# Altium PCB ui_layout-v1.0.PcbDoc
Units mm, origin at the board's own origin, x right, y up, seen from the top; angles counter-clockwise.
Board outline 78.99 x 54.1 mm, 4 copper layers (Power Plane, Signal Layer 1, Signal Layer 2, GND Plane), stack 1.605 mm thick; 44 components, 48 nets, 162 pads, 82 vias.
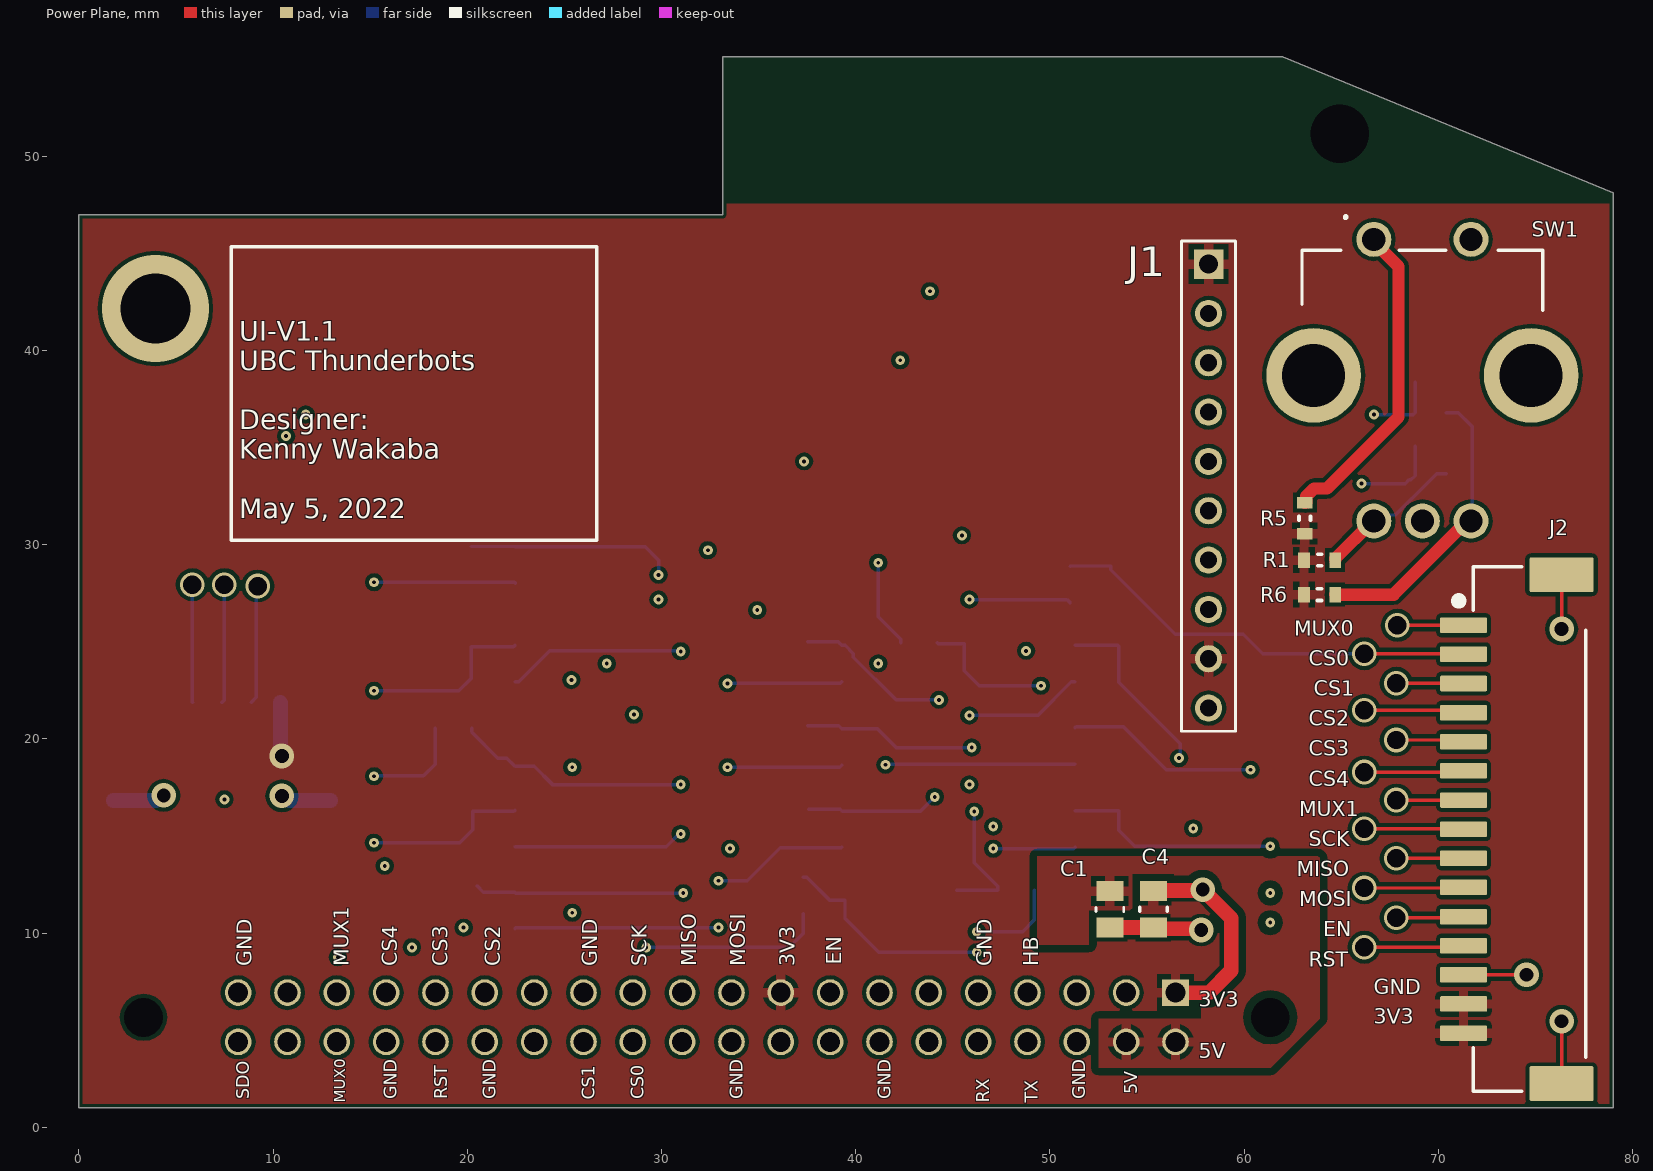
[diagram p0: Power Plane view]
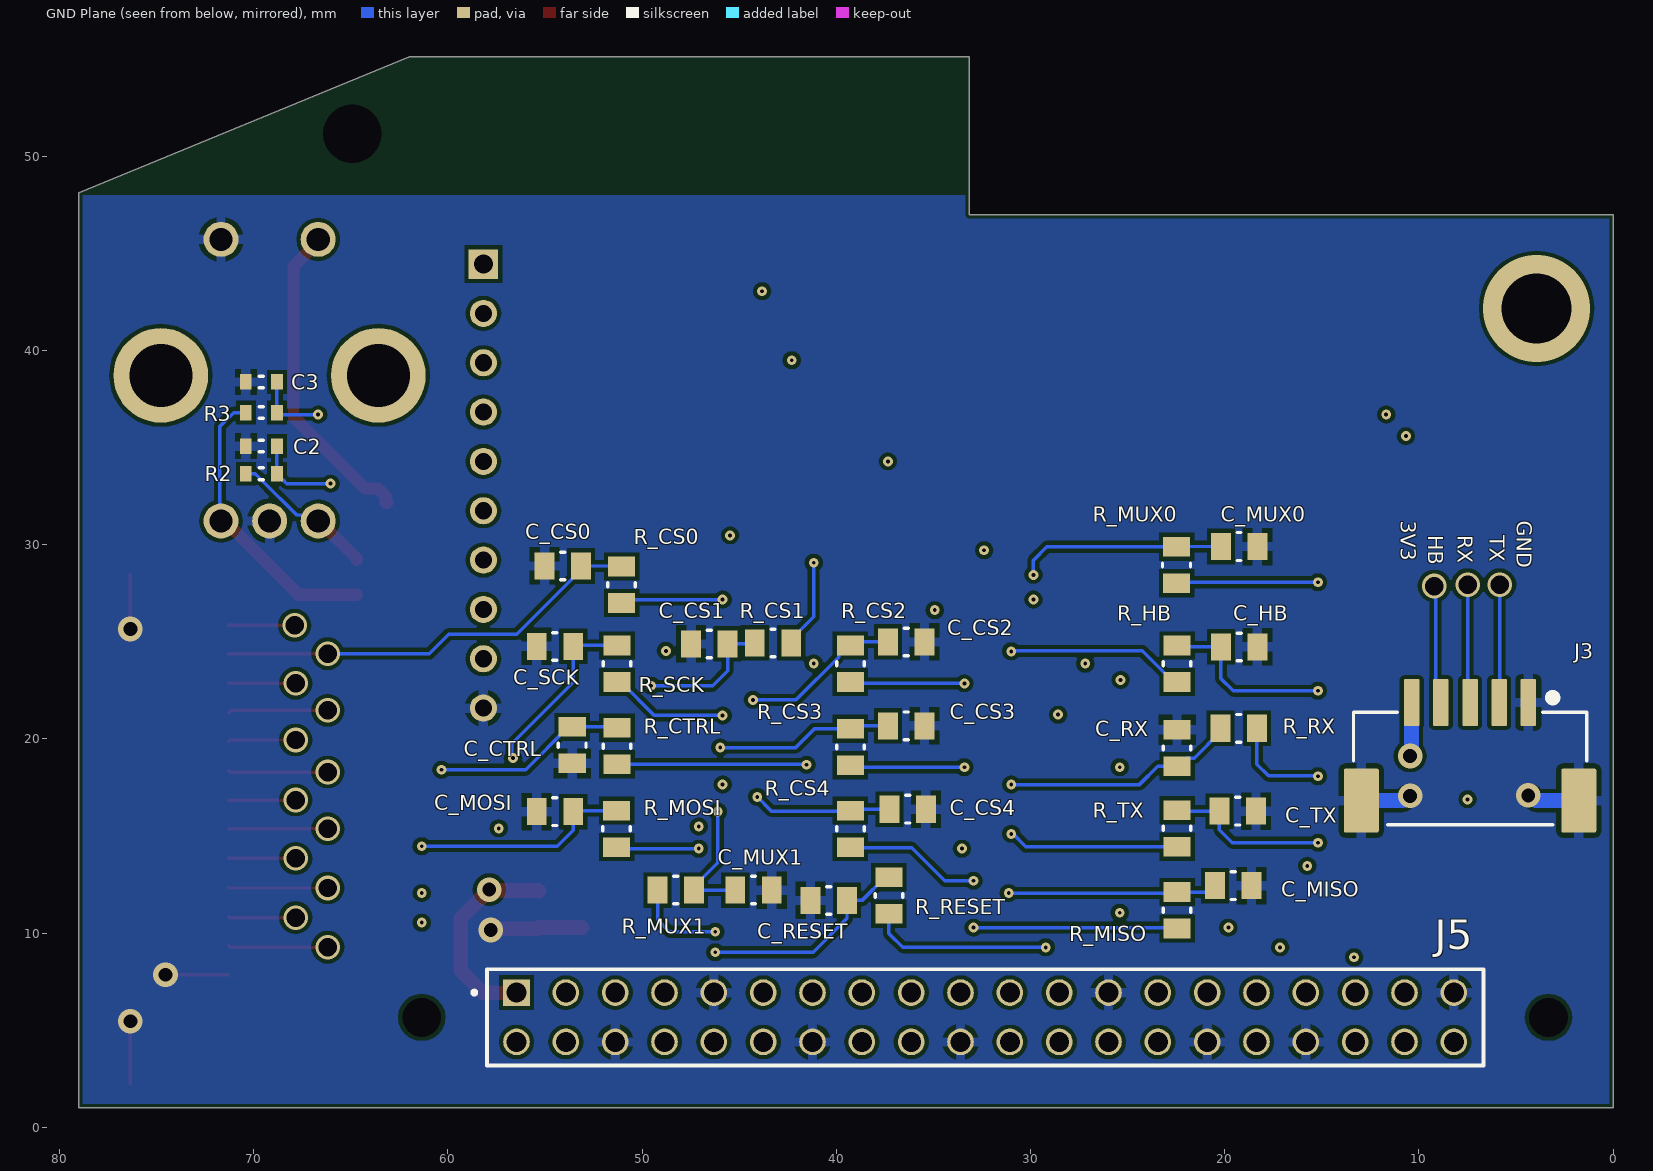
[diagram p1: GND Plane view, seen from below]
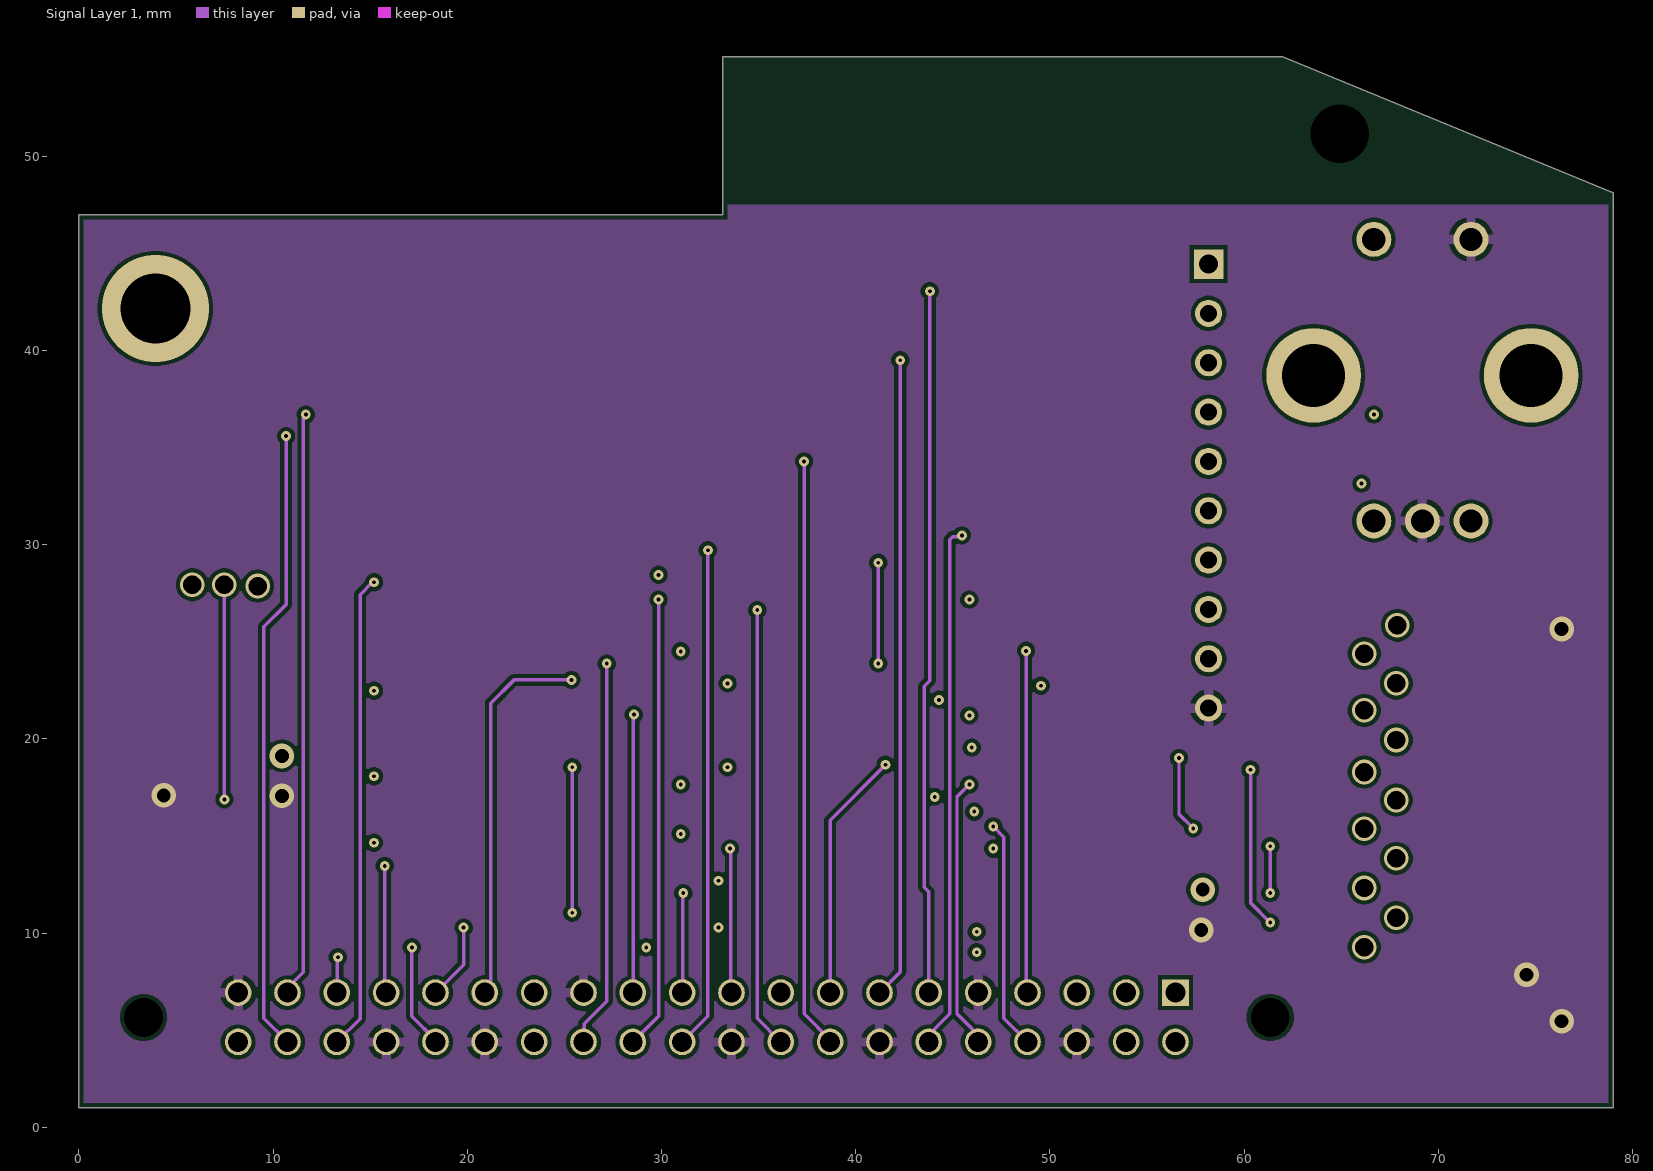
[diagram p2: Signal Layer 1]
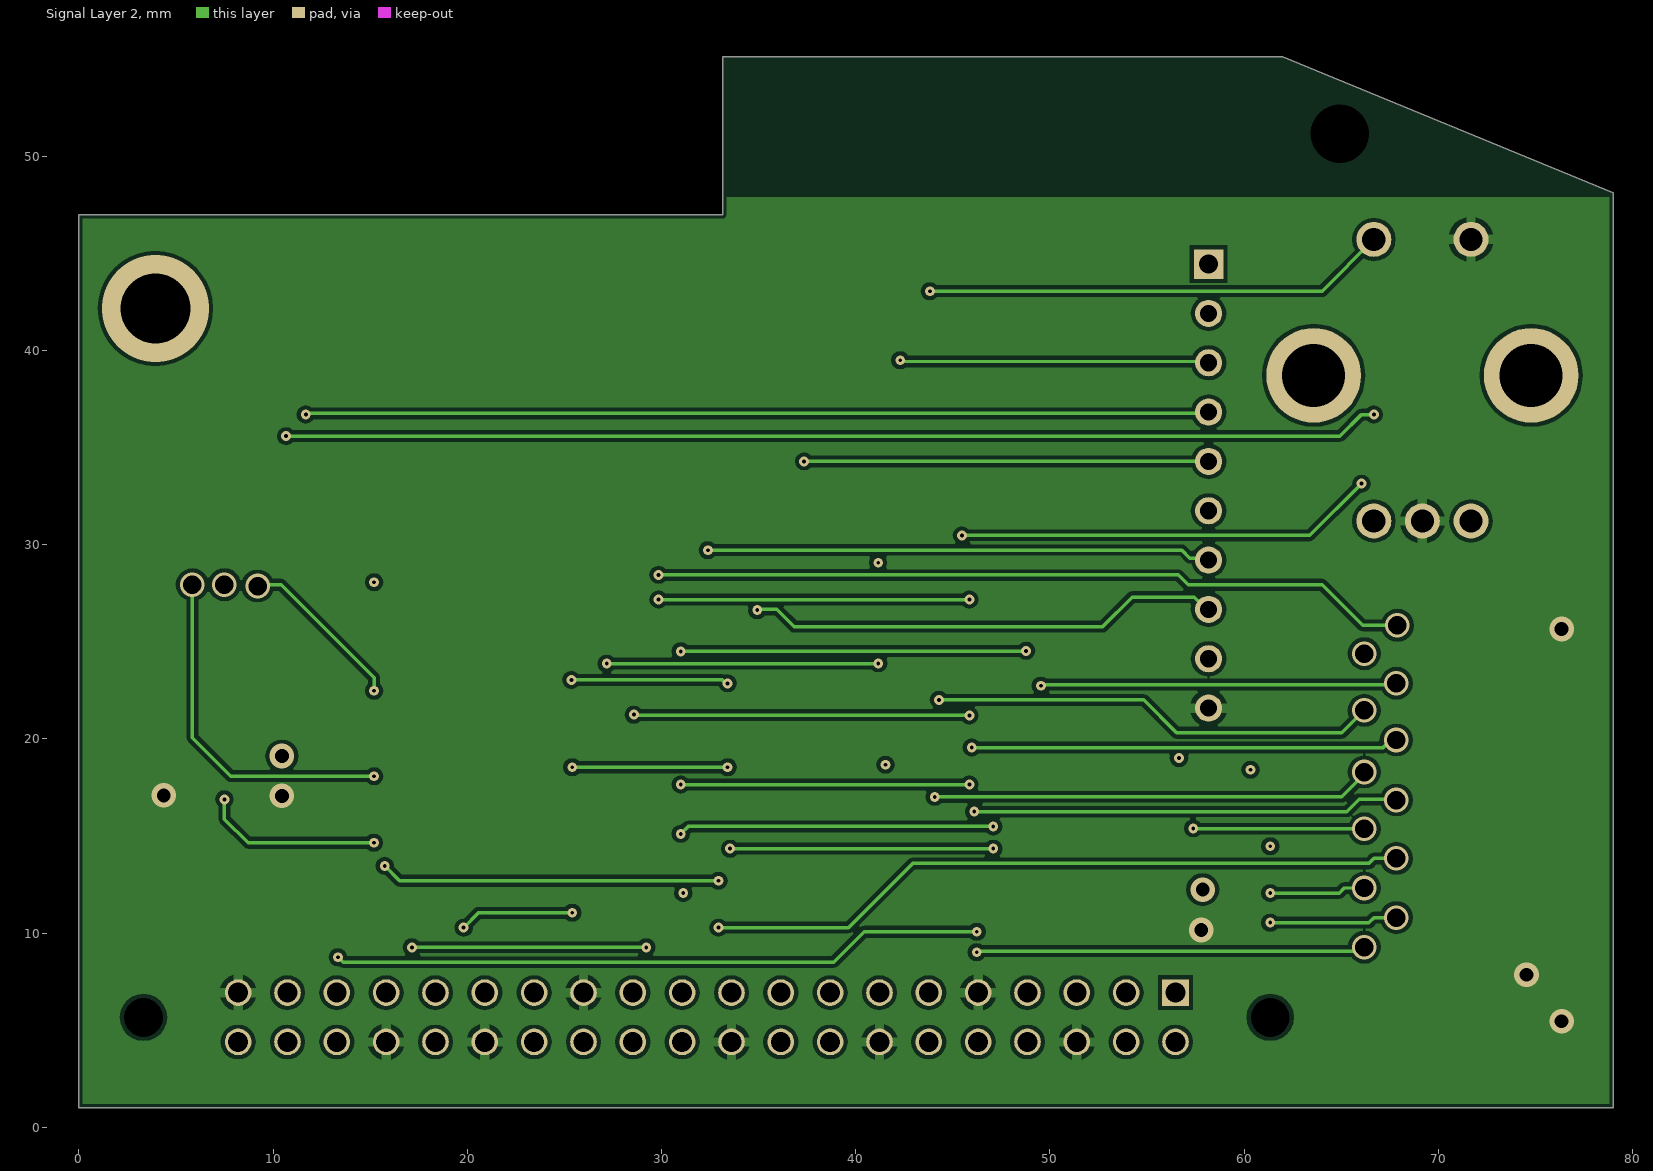
[diagram p3: Signal Layer 2]

## Layer stack, top to bottom
Top Mask: solder mask 0.015, Solder Resist, Dk 3.8
Power Plane: signal copper 0.035
Dielectric 1: prepreg 0.1, 2313, Dk 4.05
Signal Layer 1: signal copper 0.035
Core: core 1.265, FR-4, Dk 4.5
Signal Layer 2: signal copper 0.035
Dielectric 2: prepreg 0.1, 2313, Dk 4.05
GND Plane: signal copper 0.035
Bottom Mask: solder mask 0.015, Solder Resist, Dk 3.8

## Board outline
33.147,55.118 33.147,46.99 0,46.99 0,1.016 78.994,1.016 78.994,48.133 61.976,55.118

## Design rules (kind name [scope] priority, off if disabled: settings)
BoardOutlineClearance [All] p1: gap=0.2 ignorepadtopadclearanceinfootprint=FALSE except(0.4: Arc-SplitBarrior Arc-SplitContinuation Track-SplitBarrior Track-SplitContinuation SMDPad-SplitBarrior SMDPad-SplitContinuation THPad-SplitBarrior THPad-SplitContinuation Via-SplitBarrior Via-SplitContinuation Fill-SplitBarrior Fill-SplitContinuation Poly-SplitBarrior Poly-SplitContinuation Region-SplitBarrior Region-SplitContinuation Text-SplitBarrior Text-SplitContinuation)
Clearance "JETSON_5V Polygon Clearance" [(InNet('JETSON_5V')) AND InPolygon] p1: gap=0.381 ignorepadtopadclearanceinfootprint=FALSE
Clearance "POWER_5V Polygon Clearance" [(InNet('POWER_5V')) AND InPolygon] p2: gap=0.508 ignorepadtopadclearanceinfootprint=TRUE
Clearance [All] p3: gap=0.203 ignorepadtopadclearanceinfootprint=FALSE
HoleSize [All] p1: absolutevalues=TRUE maxlimit=6.3 minlimit=0.2 maxpercent=80.000 minpercent=20.000
MinimumAnnularRing [All] p1: minimumring=0.076
MinimumSolderMaskSliver [All] p1: minsoldermaskwidth=0.1
PolygonConnect PolygonConnect_1 [All] p1: thpad.connectstyle=Relief thpad.reliefconductorwidth=0.508 thpad.reliefentries=4 thpad.polygonreliefangle="90 Angle" thpad.airgapwidth=0.254 smdpad.connectstyle=Relief smdpad.reliefconductorwidth=0.508 smdpad.reliefentries=4 smdpad.polygonreliefangle="90 Angle" smdpad.airgapwidth=0.254 via.connectstyle=Direct via.reliefconductorwidth=0.508 via.reliefentries=4 via.polygonreliefangle="90 Angle" via.airgapwidth=0.254
RoutingCorners [All] p1: cornerstyle=Round minsetback=2.54 maxsetback=2.54
RoutingVias [All] p1: holewidth=0.5 width=1 viastyle="Through Hole" minholewidth=0.2 minwidth=0.45 maxholewidth=1 maxwidth=2
SilkToSilkClearance [All] p1: silktosilkclearance=0.1
SilkToSolderMaskClearance [IsPad] p1: minsilkscreentomaskgap=0.1 clearancetoexposedcopper=TRUE
SolderMaskExpansion [All] p1: expansion=0.102 istentingtop=FALSE
Width [All] p1: maxlimit=2.54 minlimit=0.178 preferedwidth=0.381
25 further rules are at their usual default settings.

## Classes and differential pairs
component class U_low-pass-filter_10: C6_14_13 R4_14_13
component class U_low-pass-filter_6: C6_14_9 R4_14_9
component class U_low-pass-filter_8: C6_14_11 R4_14_11
component class CTRL_EN: C6_14_1 R4_14_1
component class U_low-pass-filter_11: C6_14_14 R4_14_14
component class U_low-pass-filter_7: C6_14_10 R4_14_10
component class FILTER_HEARTBEAT: C6_14_2 R4_14_2
component class U_low-pass-filter_0: C6_14_3 R4_14_3
component class "Jetson Nano Interface": C1 C4 J4 J5
component class U_power: J3
component class U_motordriver: J2
component class "Rotary Encoder": C2 C3 R1 R2 R3 R5 R6 SW1
component class Display: J1
component class U_low-pass-filter_9: C6_14_12 R4_14_12
component class U_low-pass-filter_12: C6_14_15 R4_14_15
component class U_low-pass-filter_5: C6_14_8 R4_14_8
component class U_low-pass-filter_4: C6_14_7 R4_14_7
component class U_low-pass-filter_3: C6_14_6 R4_14_6
component class U_low-pass-filter_2: C6_14_5 R4_14_5
component class U_low-pass-filter_1: C6_14_4 R4_14_4
channel class low-pass-filter: CTRL_EN_FILTER HEARTBEAT_FILTER RESET_FILTER SPI1_CS0_FILTER SPI1_CS1_FILTER SPI1_CS2_FILTER SPI1_CS3_FILTER SPI1_CS4_FILTER SPI1_CS5_FILTER SPI1_MISO_FILTER SPI1_MOSI_FILTER SPI1_SCK_FILTER UART2_RX_FILTER UART2_TX_FILTER

## Components (designator, comment, footprint, x,y, rotation, side; value= is the part's Value field where it differs from the comment)
C1 "0.1uF 25V" 0805 53.086,11.227 r90 top value=0.1uF
C2 "CAP 0.010uF 16V" 0603 69.596,35.077 r180 bottom value=0.010uF
C3 "CAP 0.010uF 16V" 0603 69.596,38.379 r180 bottom value=0.010uF
C4 "0.1uF 25V" 0805 55.321,11.227 r90 top value=0.1uF
C_CS0 "330pF 16V" 0805 54.077,28.905 r180 bottom value=330pF (schematic designator C6_14)
C_CS1 "330pF 16V" 0805 46.533,24.892 r180 bottom value=330pF (schematic designator C6_14)
C_CS2 "330pF 16V" 0805 36.398,24.994 r0 bottom value=330pF (schematic designator C6_14)
C_CS3 "330pF 16V" 0805 36.398,20.676 r0 bottom value=330pF (schematic designator C6_14)
C_CS4 "330pF 16V" 0805 36.322,16.383 r0 bottom value=330pF (schematic designator C6_14)
C_CTRL "330pF 16V" 0805 53.594,19.685 r90 bottom value=330pF (schematic designator C6_14)
C_HB "330pF 16V" 0805 19.253,24.74 r0 bottom value=330pF (schematic designator C6_14)
C_MISO "330pF 16V" 0805 19.558,12.446 r0 bottom value=330pF (schematic designator C6_14)
C_MOSI "330pF 16V" 0805 54.483,16.256 r180 bottom value=330pF (schematic designator C6_14)
C_MUX0 "330pF 16V" 0805 19.253,29.909 r0 bottom value=330pF (schematic designator C6_14)
C_MUX1 "330pF 16V" 0805 44.259,12.217 r0 bottom value=330pF (schematic designator C6_14)
C_RESET "330pF 16V" 0805 40.386,11.684 r180 bottom value=330pF (schematic designator C6_14)
C_RX "330pF 16V" 0805 22.454,19.533 r270 bottom value=330pF (schematic designator C6_14)
C_SCK "330pF 16V" 0805 54.483,24.765 r180 bottom value=330pF (schematic designator C6_14)
C_TX "330pF 16V" 0805 19.329,16.281 r0 bottom value=330pF (schematic designator C6_14)
J1 "1-87220-0" 1-87224-0_TYC 58.166,44.45 r90 top
J2 "BM15B-ZESS-TBT(LF)(SN)" "JST ZE SMT 15POS" 74.041,14.605 r90 top
J3 "BM05B-ZESS-TBT(LF)(SN)" "JST ZE SMT 5POS" 7.366,19.126 r180 bottom
J5 "CN HDR 40POS" "CN HDR 40POS 0.1 TH" 32.33,5.67 r0 bottom
R1 "RES 10k 1/8W - 1%" 0603 63.881,29.21 r180 top value=1
R2 "RES 10k 1/8W - 1%" 0603 69.596,33.655 r180 bottom value=1
R3 "RES 10k 1/8W - 1%" 0603 69.596,36.805 r0 bottom value=1
R5 "RES 2k 1/8W" 0603 63.119,31.369 r90 top value=1
R6 "RES 10k 1/8W - 1%" 0603 63.881,27.432 r180 top value=1
R_CS0 "100" 0805 51.054,27.94 r270 bottom value=1 (schematic designator R4_14)
R_CS1 "100" 0805 43.256,24.943 r180 bottom value=1 (schematic designator R4_14)
R_CS2 "100" 0805 39.268,23.876 r270 bottom value=1 (schematic designator R4_14)
R_CS3 "100" 0805 39.268,19.583 r270 bottom value=1 (schematic designator R4_14)
R_CS4 "100" 0805 39.268,15.367 r270 bottom value=1 (schematic designator R4_14)
R_CTRL "100" 0805 51.287,19.634 r270 bottom value=1 (schematic designator R4_14)
R_HB "100" 0805 22.454,23.876 r270 bottom value=1 (schematic designator R4_14)
R_MISO "100" 0805 22.454,11.176 r270 bottom value=1 (schematic designator R4_14)
R_MOSI "100" 0805 51.308,15.367 r270 bottom value=1 (schematic designator R4_14)
R_MUX0 "100" 0805 22.479,28.956 r270 bottom value=1 (schematic designator R4_14)
R_MUX1 "100" 0805 48.26,12.217 r0 bottom value=1 (schematic designator R4_14)
R_RESET "100" 0805 37.287,11.938 r270 bottom value=1 (schematic designator R4_14)
R_RX "100" 0805 19.279,20.549 r180 bottom value=1 (schematic designator R4_14)
R_SCK "100" 0805 51.287,23.876 r270 bottom value=1 (schematic designator R4_14)
R_TX "100" 0805 22.454,15.392 r270 bottom value=1 (schematic designator R4_14)
SW1 "PEC12R-4220F-S0024" PEC12R4220FS0024 66.675,45.72 r0 top

## Footprints (in the part's own frame and the unit in brackets; to place one, negate y for a bottom-side part, rotate by r counter-clockwise, add the part's x,y. Pads: shape width x height; smd on the part's side, far side on the other; paste and mask are expansions set on the pad)
1-87224-0_TYC [mil]
  rect 60x60 hole 38 mask+0: 1(0,0)
  round 55 hole 35 mask+0: 2(-100,0) 3(-200,0) 4(-300,0) 5(-400,0) 6(-500,0) 7(-600,0) 8(-700,0) 9(-800,0) 10(-900,0)
  silkscreen extent -947,-55 47,55, body extent -950,-50 50,50, height 90
0603 [mm] "Chip Resistor, 2-Leads, Body 1.60x0.80mm, IPC High Density"
  rect 0.6x0.8 smd mask+0.1: 1(-0.8,0) 2(0.8,0)
  silkscreen extent -0.1,-0.3 0.1,0.3, body extent -0.8,-0.4 0.8,0.4, height 0.6
0805 [mil] "40 Position Header Connector 0.100\" (2.54mm) Through Hole"
  rect 40x55 smd: 1(-37,0) 2(37,0)
  silkscreen extent -4,-28 4,28, body extent -47,-28 47,28, height 24
"CN HDR 40POS 0.1 TH" [mm] "40 Position Header Connector 0.100\" (2.54mm) Through Hole"
  rect 1.37x1.37 hole 1.02: 01(24.13,-1.27)
  round 1.37 hole 1.02: 02(24.13,1.27) 03(21.59,-1.27) 04(21.59,1.27) 05(19.05,-1.27) 06(19.05,1.27) 07(16.51,-1.27) 08(16.51,1.27) 09(13.97,-1.27) 10(13.97,1.27) 11(11.43,-1.27) 12(11.43,1.27) 13(8.89,-1.27) 14(8.89,1.27) 15(6.35,-1.27) 16(6.35,1.27) 17(3.81,-1.27) 18(3.81,1.27) 19(1.27,-1.27) 20(1.27,1.27) 21(-1.27,-1.27) 22(-1.27,1.27) 23(-3.81,-1.27) 24(-3.81,1.27) 25(-6.35,-1.27) 26(-6.35,1.27) 27(-8.89,-1.27) 28(-8.89,1.27) 29(-11.43,-1.27) 30(-11.43,1.27) 31(-13.97,-1.27) 32(-13.97,1.27) 33(-16.51,-1.27) 34(-16.51,1.27) 35(-19.05,-1.27) 36(-19.05,1.27) 37(-21.59,-1.27) 38(-21.59,1.27) 39(-24.13,-1.27) 40(-24.13,1.27)
  silkscreen extent -25.66,-2.47 26.4,2.47
"JST ZE SMT 5POS" [mm] "5 POS HDR JST ZE"
  rrect10% 1.8x3.3 smd: 0(-5.6,-2.3) 0(5.6,-2.3)
  rrect10% 0.8x2.4 smd: 1(3,2.75) 2(1.5,2.75) 3(0,2.75) 4(-1.5,2.75) 5(-3,2.75)
  silkscreen extent -6,-3.55 6,3, body extent -6,-2.9 6,4.1, height 7.51
"JST ZE SMT 15POS" [mm] "15 POS HDR JST ZE"
  rrect10% 1.8x3.3 smd: 0(-12.35,-2.3) 0(13.85,-2.3)
  rrect10% 0.8x2.4 smd: 1(11.25,2.75) 2(9.75,2.75) 3(8.25,2.75) 4(6.75,2.75) 5(5.25,2.75) 6(3.75,2.75) 7(2.25,2.75) 8(0.75,2.75) 9(-0.75,2.75) 10(-2.25,2.75) 11(-3.75,2.75) 12(-5.25,2.75) 13(-6.75,2.75) 14(-8.25,2.75) 15(-9.75,2.75)
  silkscreen extent -12.75,-3.55 14.26,3, body extent -12.75,-3.55 14.25,3.45, height 7.6
PEC12R4220FS0024 [mm]
  round 1.8 hole 1.2: 1(0,0) 2(5,0) A1(0,-14.5) B1(5,-14.5) C1(2.5,-14.5)
  round 4.875 hole 3.25: MH1(8.1,-7) MH2(-3.1,-7)
  silkscreen extent -3.7,-3.65 8.7,1.2, body extent -4.61,-15 9.62,0.5, height 20.1

## Part data
C1 C4: library part "CAP 0.1uF 25V", "Default Symbol for Capacitors", Operating Temperature="-55°C ~ 125°C", Rating=25V, Temperature Coefficient=X7R, Tolerance=10%, Part Number="CAP 0.1uF 25V"
C2 C3: "Default Symbol for Capacitors", Operating Temperature="-55°C ~ 125°C", Rating=16V, Temperature Coefficient=X5R, Tolerance=10%, Part Number="CAP 0.010uF 16V"
C_CS0 C_CS1 C_CS2 C_CS3 C_CS4 C_CTRL C_HB C_MISO C_MOSI C_MUX0 C_MUX1 C_RESET C_RX C_SCK C_TX: library part "CAP 330pF 16V", "Default Symbol for Capacitors", Rating=16V, Temperature Coefficient=X5R, Tolerance=10%, Part Number="CAP 330pF 16V"
J1: "No Description Available", Mfr_Name="TE Connectivity", Copyright="Copyright (C) 2021 Ultra Librarian. All rights reserved.", Manufacturer_Part_Number=1-87220-0, RefDes=RefDes, Type=DEV
J2: library part "CN 15POS JST ZE SMT", "CONN HEADER VERT SMD 15POS ZE", Supplier Part Number 1=455-4211-1-ND, Supplier 1=Digi-Key
J3: library part "CN 5POS JST ZE SMT", "CONN HEADER VERT SMD 5POS ZE", Supplier Part Number 1=455-2383-1-ND, Manufacturer Part Number=BM05B-ZESS-TBT(LF)(SN), Part Number="CN 5POS JST ZE SMT", Pin Count=5, Supplier 1=Digi-Key, Supplier URL 1=https://www.digikey.ca/en/products/detail/jst-sales-america-inc/BM05B-ZESS-TBT-LF-SN/1886989?s=N4IgTCBcDaIEIFkAMBWOBaAWgUQMq-QBU5CAKAGQDEBKU3AOWpAF0BfIA
J5: "40 Position Header Connector", Supplier Part Number 1=S6104-ND, Part Number="CN HDR 40POS", Pin Count=40, Supplier 1=Digi-Key, Supplier URL 1=https://www.digikey.ca/en/products/detail/sullins-connector-solutions/PPTC202LFBN-RC/807240?s=N4IgTCBcDaIMoDYCMAGALAWgHIBEQF0BfIA
R1 R2 R3 R5 R6: "Default Resistor Symbol", Package=0805, Power (Watts)=0.125W, Tolerance=5%
  R1 R2 R3 R6: Part Number="RES 10k 1/8W - 1%"
  R5: Part Number="RES 2k 1/8W"
R_CS0 R_CS1 R_CS2 R_CS3 R_CS4 R_CTRL R_HB R_MISO R_MOSI R_MUX0 R_MUX1 R_RESET R_RX R_SCK R_TX: library part "RES 100.0 1/8W", "Default Resistor Symbol", Package=0805, Power (Watts)=0.125W, Tolerance=5%, Part Number="RES 100.0 1/8W"
SW1: library part PEC12R4220FS0024, "Rotary Encoder", Manufacturer_Name=Bourns, Mouser Part Number=652-PEC12R-4220F-S24, Supplier Part Number 1=PEC12R-4220F-S0024-ND, Arrow Part Number=PEC12R-4220F-S0024, Arrow Price/Stock=https://www.arrow.com/en/products/pec12r-4220f-s0024/bourns, Datasheet Link=https://componentsearchengine.com/Datasheets/5/PEC12R-4220F-S0024.pdf, Height=20mm, Manufacturer_Part_Number=PEC12R-4220F-S0024, Mouser Price/Stock=https://www.mouser.co.uk/ProductDetail/Bourns/PEC12R-4220F-S0024?qs=Zq5ylnUbLm7u%2FuPQvUoR4Q%3D%3D, Part Number=PEC12R4220FS0024, Supplier 1=Digi-key, Supplier URL 1=https://www.digikey.ca/en/products/detail/bourns-inc/PEC12R-4220F-S0024/4499653

## Free pads (board coordinates)
  round 1.524 hole 2: 1(3.327,5.664) 1(61.341,5.664)
  round 1.524 hole 3: 1(64.922,51.156)

## Via types
v1: diameter 0.508, hole 0.2, Power Plane to GND Plane, 58 vias
v2: diameter 1.27, hole 0.95, Power Plane to GND Plane, 15 vias
v3: diameter 1.27, hole 0.711, Power Plane to GND Plane, 8 vias
v4: diameter 5.5, hole 3.6, Power Plane to GND Plane, 1 vias

## Nets (pads, with @x,y where several pads share a name; then routed paths per layer and width w, separated by ;. In a path a pad name is that pad's centre, name@x,y a point inside that pad or via, vN(x,y) a via of type N, cw(c..) or ccw(c..) an arc to the next point about the centre after c; other vN are vias at no path point)
DRV_EN: J5.15 R_CTRL.2 | length 22.7
  Signal Layer 1 w0.178: J5.15 38.68,15.82 v1(41.529,18.669)
  GND Plane w0.178: v1(41.529,18.669) 41.557,18.697 51.285,18.697 R_CTRL.2
FILTER_DRV_EN: C_CTRL.2 J2.11 R_CTRL.1 | length 28.3
  Power Plane w0.178: v2(67.832,10.802) 71.238,10.802 J2.11
  Signal Layer 1 w0.178: v1(60.325,18.415) 60.325,11.557 v1(61.341,10.541)
  Signal Layer 2 w0.178: v1(61.341,10.541) 66.421,10.541 66.682,10.802 v2(67.832,10.802)
  GND Plane w0.178: R_CTRL.1 51.338,20.625 C_CTRL.2 53.785,20.625 55.994,18.415 v1(60.325,18.415)
FILTER_HEARTBEAT: C_HB.2 J3.4 R_HB.1 | length 24
  Signal Layer 2 w0.178: v2(9.204,27.873) 9.271,27.94 10.414,27.94 15.198,23.156 v1(15.198,22.479)
  GND Plane w0.178: J3.4 9.137,22.147 9.137,27.806 v2(9.204,27.873) ; v1(15.198,22.479) 19.558,22.479 20.193,23.114 C_HB.2 22.377,24.74 R_HB.1
FILTER_IN_2: J5.07 R_HB.2 | length 44.6
  Signal Layer 1 w0.178: v1(48.768,24.536) 48.768,7.01 J5.07@48.844,6.934
  Signal Layer 2 w0.178: v1(30.988,24.511) 31.001,24.524 48.755,24.524 v1(48.768,24.536)
  GND Plane w0.178: R_HB.2 22.644,22.936 24.244,24.536 v1@30.988,24.536
FILTER_IN_12: J5.32 R_RESET.2 | length 26.8
  Signal Layer 1 w0.178: v1(17.145,9.271) 17.145,5.715 18.36,4.5 J5.32
  Signal Layer 2 w0.178: v1(17.145,9.271) v1(29.21,9.271)
  GND Plane w0.178: v1(29.21,9.271) 36.576,9.271 37.287,9.982 R_RESET.2
FILTER_OUT_12: C_RESET.2 J2.12 R_RESET.1 | length 36.3
  Power Plane w0.178: v2(66.181,9.278) 71.214,9.278 J2.12
  Signal Layer 2 w0.178: v1(46.228,9.017) 46.291,9.08 65.983,9.08 v2(66.181,9.278)
  GND Plane w0.178: R_RESET.1 37.478,12.878 38.672,11.684 C_RESET.2 39.446,10.758 41.187,9.017 v1(46.228,9.017)
FILTER_RE_A: C2.2 J5.12 R2.2 | length 53.2
  Signal Layer 1 w0.178: J5.12@43.764,4.394 43.764,4.727 44.07,5.032 44.07,5.081 44.831,5.842 44.831,30.264 44.984,30.417 45.403,30.417 v1(45.466,30.48)
  Signal Layer 2 w0.178: v1(45.466,30.48) 63.373,30.48 v1(66.04,33.147)
  GND Plane w0.178: v1(66.04,33.147) 68.288,33.147 68.485,33.344 68.585,33.344 68.796,33.555 R2.2 C2.2
FILTER_RE_B: C3.2 J5.38 R3.1 | length 92.4
  Signal Layer 1 w0.178: v1(10.668,35.592) 10.668,26.924 9.525,25.781 9.525,5.615 J5.38
  Signal Layer 2 w0.178: v1(10.668,35.592) 64.929,35.592 66.04,36.703 v1(66.675,36.703)
  GND Plane w0.178: v1(66.675,36.703) 68.694,36.703 R3.1 C3.2
FILTER_RE_PB: J5.11 R5.2 SW1.1 | length 76.9
  Power Plane w0.635: R5.2 63.184,32.169 63.202,32.186 63.202,32.504 63.591,32.893 64.262,32.893 67.945,36.576 67.945,44.323 66.675,45.593 SW1.1
  Signal Layer 1 w0.178: J5.11 43.76,12.135 43.523,12.372 43.523,22.712 43.815,23.004 v1(43.815,43.053)
  Signal Layer 2 w0.178: v1(43.815,43.053) 64.008,43.053 SW1.1
  GND Plane w0.178: SW1.1@66.611,45.656 SW1.1
I2C_1_SCL: J5.28
I2C_1_SDA: J5.27
I2C_2_SCL: J5.05
I2C_2_SDA: J5.03
I2S_4_SDOUT: J5.40
JETSON_3V3: C4.2 J1.1 J1.9 J2.14 J2.15 J3.5 J5.01 J5.17 R1.2 R5.1 R6.2 | length 13.5
  Power Plane w0.762: C4.2 55.359,12.205 57.823,12.205 v3(57.861,12.243) 59.334,10.77 59.334,8.077 58.191,6.934 J5.01@56.464,6.934
  GND Plane w0.762: J3.5 10.385,21.857 10.385,19.193 v3(10.452,19.126)
JETSON_5V: C1.2 J5.02 J5.04
JETSON_GND: C1.1 C2.1 C3.1 C4.1 C_CS0.1 C_CS1.1 C_CS2.1 C_CS3.1 C_CS4.1 C_CTRL.1 C_HB.1 C_MISO.1 C_MOSI.1 C_MUX0.1 C_MUX1.1 C_RESET.1 C_RX.1 C_SCK.1 C_TX.1 J1.10 J2.0 J2.13 J3.0 J3.1 J5.06 J5.09 J5.14 J5.20 J5.25 J5.30 J5.34 J5.39 SW1.2 SW1.C1 | length 19.3
  Power Plane w0.178: J2.13 v3(74.537,7.855) ; J2.0@76.341,2.255 v3(76.341,5.468) ; v3(76.341,25.661) J2.0@76.341,28.455
  Power Plane w0.762: C1.1 C4.1 55.385,10.223 57.721,10.223 v3(57.785,10.16)
  GND Plane w0.762: J3.0@1.766,16.826 3.963,16.826 4.231,17.094 v3(4.369,17.094) ; v3(10.452,17.069) 10.59,17.069 10.832,16.826 J3.0@12.966,16.826
MUX_SEL_0: J5.36 R_MUX0.2 | length 31.8
  Signal Layer 1 w0.178: J5.36 14.478,5.598 14.478,27.432 15.113,28.067 v1(15.198,28.067)
  GND Plane w0.178: v1(15.198,28.067) 22.428,28.067 R_MUX0.2
MUX_SEL_0_FILTER: C_MUX0.2 J2.1 R_MUX0.1 | length 53.2
  Power Plane w0.178: v2(67.887,25.85) 71.286,25.85 J2.1
  Signal Layer 2 w0.178: v1(29.845,28.448) 56.602,28.448 57.11,27.94 64.008,27.94 66.103,25.845 v2@67.882,25.845
  GND Plane w0.178: C_MUX0.2 22.466,29.909 R_MUX0.1 29.159,29.896 29.845,29.21 v1(29.845,28.448)
MUX_SEL_1: J5.35 R_MUX1.2 | length 40.3
  Signal Layer 1 w0.178: J5.35 13.307,6.967 13.307,8.735 v1(13.335,8.763)
  Signal Layer 2 w0.178: v1(13.335,8.763) 13.35,8.763 13.604,8.509 38.862,8.509 40.428,10.075 v1(46.228,10.075)
  GND Plane w0.178: v1(46.228,10.075) 48.596,10.075 49.2,10.679 R_MUX1.2
MUX_SEL_1_FILTER: C_MUX1.2 J2.7 R_MUX1.1 | length 32.1
  Power Plane w0.178: v2(67.832,16.855) J2.7
  Signal Layer 2 w0.178: v1(46.101,16.256) 65.278,16.256 65.913,16.891 67.796,16.891 v2(67.832,16.855)
  GND Plane w0.178: C_MUX1.2 R_MUX1.1 47.32,12.408 46.101,13.627 v1(46.101,16.256)
NetR1_1: R1.1 R2.1 SW1.A1 | length 7.6
  Power Plane w0.635: R1.1 64.681,29.275 66.626,31.22 SW1.A1
  GND Plane w0.178: SW1.A1 66.985,31.53 67.784,31.53 69.523,33.269 69.909,33.655 R2.1
NetR3_2: R3.2 R6.1 SW1.B1 | length 15.1
  Power Plane w0.635: R6.1 67.691,27.432 71.479,31.22 SW1.B1
  GND Plane w0.178: R3.2 71.029,36.805 71.73,36.104 71.73,31.275 SW1.B1
SCREEN_D/C: J1.7 J5.22 | length 51.9
  Signal Layer 1 w0.178: J5.22@31.064,4.404 32.385,5.725 v1(32.385,29.718)
  Signal Layer 2 w0.178: v1(32.385,29.718) 56.796,29.718 57.201,29.313 58.063,29.313 J1.7
SCREEN_MOSI: J1.4 J5.37 | length 76.7
  Signal Layer 1 w0.178: J5.37@10.744,6.934 10.744,7.181 11.557,7.994 11.557,36.487 11.684,36.614 v1(11.684,36.703)
  Signal Layer 2 w0.178: v1(11.684,36.703) 11.747,36.766 58.102,36.766 J1.4
SCREEN_RESET: J1.8 J5.18 | length 47.3
  Signal Layer 1 w0.178: v1(34.925,26.632) 34.925,5.613 J5.18@36.144,4.394
  Signal Layer 2 w0.178: v1(34.925,26.632) 34.963,26.67 35.941,26.67 36.83,25.781 52.705,25.781 54.229,27.305 57.436,27.305 58.071,26.67 J1.8
SCREEN_SCK: J1.3 J5.13 | length 49
  Signal Layer 1 w0.178: J5.13@41.224,6.934 42.291,8.001 v1(42.291,39.497)
  Signal Layer 2 w0.178: v1(42.291,39.497) 42.354,39.434 58.102,39.434 J1.3
  GND Plane w0.178: J1.3@58.115,39.395 J1.3@58.141,39.421
SPI_1_CS0: J5.24 R_CS0.2 | length 44.6
  Signal Layer 1 w0.178: J5.24 28.53,4.4 29.845,5.715 v1(29.845,27.178)
  Signal Layer 2 w0.178: v1(29.845,27.178) v1(45.847,27.178)
  GND Plane w0.178: v1(45.847,27.178) 50.876,27.178 R_CS0.2
SPI_1_CS0_FILTER: C_CS0.2 J2.2 R_CS0.1 | length 22.2
  Power Plane w0.178: v2(66.181,24.391) 71.255,24.391 J2.2
  GND Plane w0.178: R_CS0.1 51.079,28.905 C_CS0.2 53.137,28.715 56.451,25.4 59.944,25.4 60.953,24.391 v2(66.181,24.391)
SPI_1_CS1: J5.26 R_CS1.2 | length 43.8
  Signal Layer 1 w0.178: J5.26@25.984,4.394 26.021,4.431 26.021,5.346 27.178,6.502 v1(27.178,23.876) ; v1@41.148,29.083 41.148,23.899 v1(41.159,23.887)
  Signal Layer 2 w0.178: v1(27.178,23.876) 41.148,23.876 v1(41.159,23.887)
  GND Plane w0.178: v1(41.159,29.072) 41.159,26.29 42.316,25.133 R_CS1.2
SPI_1_CS1_FILTER: C_CS1.2 J2.3 R_CS1.1 | length 28.9
  Power Plane w0.178: v2(67.832,22.867) 71.279,22.867 J2.3
  Signal Layer 2 w0.178: v1(49.53,22.737) 49.593,22.8 67.765,22.8 v2(67.832,22.867)
  GND Plane w0.178: R_CS1.1 44.247,24.892 C_CS1.2 45.593,23.512 46.368,22.737 v1(49.53,22.737)
SPI_1_CS2: J5.29 R_CS2.2 | length 33.7
  Signal Layer 1 w0.178: J5.29 20.9,7.276 21.209,7.585 21.209,21.844 22.402,23.037 v1(25.358,23.037)
  Signal Layer 2 w0.178: v1(25.358,23.037) 33.134,23.037 33.312,22.86 v1(33.401,22.86)
  GND Plane w0.178: v1(33.401,22.86) 39.192,22.86 R_CS2.2
SPI_1_CS2_FILTER: C_CS2.2 J2.4 R_CS2.1 | length 36.3
  Power Plane w0.178: v2(66.181,21.47) 71.176,21.47 J2.4
  Signal Layer 2 w0.178: v1(44.285,22.013) 54.822,22.013 56.515,20.32 65.031,20.32 v2(66.181,21.47)
  GND Plane w0.178: C_CS2.2@37.528,24.994 39.091,24.994 R_CS2.1 39.459,24.816 39.878,24.397 39.878,24.206 42.071,22.013 v1(44.285,22.013)
SPI_1_CS3: J5.31 R_CS3.2 | length 31.3
  Signal Layer 1 w0.178: J5.31 18.37,6.94 19.812,8.382 v1(19.812,10.287) ; v1(25.4,11.049) v1(25.4,18.542)
  Signal Layer 2 w0.178: v1(19.812,10.287) 20.574,11.049 v1(25.4,11.049) ; v1(25.4,18.542) v1(33.401,18.542)
  GND Plane w0.178: v1(33.401,18.542) 39.167,18.542 R_CS3.2
SPI_1_CS3_FILTER: C_CS3.2 J2.5 R_CS3.1 | length 34.4
  Power Plane w0.178: v2(67.832,19.946) 71.2,19.946 J2.5
  Signal Layer 2 w0.178: v1(45.974,19.558) 67.148,19.558 67.536,19.946 v2(67.832,19.946)
  GND Plane w0.178: C_CS3.2@37.528,20.676 39.116,20.676 R_CS3.1 41.121,20.523 42.086,19.558 v1(45.974,19.558)
SPI_1_CS4: J5.33 R_CS4.2 | length 31.1
  Signal Layer 1 w0.178: v1(15.748,13.462) 15.748,7.012 J5.33
  Signal Layer 2 w0.178: v1(15.748,13.462) 16.51,12.7 v1(32.931,12.7)
  GND Plane w0.178: v1(32.931,12.7) 34.417,12.7 36.119,14.402 39.243,14.402 R_CS4.2
SPI_1_CS4_FILTER: C_CS4.2 J2.6 R_CS4.1 | length 34.7
  Power Plane w0.178: v2(66.181,18.295) 71.231,18.295 J2.6
  Signal Layer 2 w0.178: v1(44.069,17.018) 65.024,17.018 66.181,18.175 v2(66.181,18.295)
  GND Plane w0.178: C_CS4.2@37.567,16.383 39.192,16.383 R_CS4.1 39.292,16.284 43.335,16.284 v1(44.069,17.018)
SPI_1_MISO: J2.9 R_MISO.2 | length 50.4
  Power Plane w0.178: v2(67.832,13.85) 71.241,13.85 71.268,13.878 J2.9
  Signal Layer 2 w0.178: v1(32.931,10.287) 39.624,10.287 42.926,13.589 66.421,13.589 66.682,13.85 v2(67.832,13.85)
  GND Plane w0.178: R_MISO.2 22.504,10.287 v1(32.931,10.287)
SPI_1_MISO_FILTER: C_MISO.2 J5.21 R_MISO.1 | length 15.9
  Signal Layer 1 w0.178: J5.21@31.064,6.934 31.087,6.957 31.087,12.037 v1(31.115,12.065)
  GND Plane w0.178: C_MISO.2 20.828,12.116 R_MISO.1 22.504,12.065 v1(31.115,12.065)
SPI_1_MOSI: J5.19 R_MOSI.2 | length 25.3
  Signal Layer 1 w0.178: v1(33.528,14.351) 33.566,14.313 33.566,6.972 J5.19@33.604,6.934
  Signal Layer 2 w0.178: v1(33.528,14.351) v1(47.079,14.351)
  GND Plane w0.178: v1(47.079,14.351) 51.232,14.351 R_MOSI.2
SPI_1_MOSI_FILTER: C_MOSI.2 J2.10 R_MOSI.1 | length 23.8
  Power Plane w0.178: v2(66.181,12.326) 71.262,12.326 J2.10
  Signal Layer 1 w0.178: v1(61.341,12.065) v1(61.341,14.478)
  Signal Layer 2 w0.178: v1(61.341,12.065) 64.897,12.065 65.158,12.326 v2(66.181,12.326)
  GND Plane w0.178: R_MOSI.1 C_MOSI.2@53.543,16.307 ; C_MOSI.2 53.543,15.291 54.356,14.478 v1(61.341,14.478)
SPI_1_SCK: J5.23 R_SCK.2 | length 37.8
  Signal Layer 1 w0.178: J5.23 28.547,6.967 28.547,21.223 v1(28.575,21.251)
  Signal Layer 2 w0.178: v1(28.575,21.251) 28.596,21.23 45.826,21.23 v1(45.847,21.209)
  GND Plane w0.178: v1(45.847,21.209) 49.369,21.209 51.097,22.936 R_SCK.2
SPI_1_SCK_FILTER: C_SCK.2 J2.8 R_SCK.1 | length 27.2
  Power Plane w0.178: v2(66.181,15.374) 71.272,15.374 J2.8
  Signal Layer 1 w0.178: v1(56.642,19.012) 56.642,16.129 v1(57.376,15.395)
  Signal Layer 2 w0.178: v1(57.376,15.395) 57.387,15.384 66.171,15.384 v2(66.181,15.374)
  GND Plane w0.178: R_SCK.1 53.492,24.816 C_SCK.2 53.543,22.911 56.705,19.749 56.705,19.571 56.705,19.075 v1(56.642,19.012)
TFT_CS: J1.5 J5.16 | length 51.3
  Signal Layer 1 w0.178: v1(37.338,34.29) 37.338,5.842 38.68,4.5 J5.16
  Signal Layer 2 w0.178: v1(37.338,34.29) J1.5
UART_2_RX: J3.2 R_RX.2 | length 29.4
  Signal Layer 2 w0.178: v2(5.842,27.94) 5.842,20.066 7.827,18.081 v1(15.198,18.081)
  GND Plane w0.178: v2(5.842,27.94) 5.842,21.9 J3.2 ; v1(15.198,18.081) 15.214,18.097 17.742,18.097 18.339,18.694 R_RX.2
UART_2_RX_FILTER: C_RX.2 J5.10 R_RX.1 | length 40.9
  Signal Layer 1 w0.178: v1(45.847,17.653) 45.212,17.018 45.212,5.842 45.99,5.064 45.99,5.045 46.3,4.735 J5.10
  Signal Layer 2 w0.178: v1(30.988,17.653) v1(45.847,17.653)
  GND Plane w0.178: R_RX.1 20.218,20.358 21.565,19.012 22.034,19.012 C_RX.2 23.444,18.593 24.384,17.653 v1(30.988,17.653)
UART_2_TX: J5.08 R_TX.2 | length 36.9
  Signal Layer 1 w0.178: v1@47.076,15.497 47.625,14.948 47.625,5.615 J5.08
  Signal Layer 2 w0.178: v1(30.988,15.113) 31.369,15.494 v1(47.079,15.494) v1@47.084,15.494
  GND Plane w0.178: R_TX.2 30.238,14.453 30.899,15.113 v1(30.988,15.113)
UART_2_TX_FILTER: C_TX.2 J3.3 R_TX.1 | length 34.9
  Signal Layer 1 w0.178: v2(7.49,27.943) v2(7.49,27.943) 7.491,16.893 v1(7.493,16.891)
  Signal Layer 2 w0.178: v1(7.493,16.891) 7.493,15.875 8.712,14.656 v1(15.189,14.656)
  GND Plane w0.178: J3.3 7.49,22 v2(7.49,27.943) ; v1(15.189,14.656) 19.609,14.656 20.269,15.316 C_TX.2 22.403,16.281 R_TX.1
pads on no net: J1.2 J1.6 SW1.MH1 SW1.MH2
copper on no net:
  other v4: 3.937,42.164

## Polygon pours and split planes (outlines as drawn)
JETSON_3V3 on Power Plane "JETSON_3V3_L01_P007" (solid, pour order 7): 0,0 0,47.549 78.994,47.549 78.994,0
JETSON_5V on Power Plane "JETSON_5V_L01_P004" (solid, pour order 4): 63.881,13.97 63.881,5.588 61.355,3.062 52.501,3.062 52.501,5.588 57.785,5.588 57.785,9.398 49.352,9.398 49.352,13.97
JETSON_GND on GND Plane "JETSON_GND_L04_P001" (solid, pour order 1): 0,0 0,48 79,48 79,0
JETSON_GND on Signal Layer 2 "JETSON_GND_L03_P010" (solid, pour order 10): 0.127,47.879 0.127,0.127 78.867,0.127 78.867,47.879
JETSON_GND on Signal Layer 1 "JETSON_GND_L02_P011" (solid, pour order 11): 0.254,46.736 0.254,1.27 78.74,1.27 78.74,47.498 33.401,47.498 33.401,46.736

## Silkscreen, mask and mechanical layers (free items; w line width, h text height)
Top Overlay:
  lines w0.178: 7.856,30.225 7.856,45.339 26.67,45.339 26.67,30.225 7.856,30.225
  text "UI-V1.1 / UBC Thunderbots /  / Designer: / Kenny Wakaba /  / May 5, 2022" at 8.255,31.369 h1.02
  text "MUX0" at 62.568,25.324 h0.76
  text "CS0" at 63.33,23.774 h0.76
  text "CS1" at 63.584,22.225 h0.76
  text "CS2" at 63.33,20.676 h0.76
  text "CS3" at 63.33,19.126 h0.76
  text "CS4" at 63.33,17.577 h0.76
  text "MUX1" at 62.822,16.027 h0.76
  text "SCK" at 63.33,14.478 h0.76
  text "MISO" at 62.695,12.929 h0.76
  text "MOSI" at 62.822,11.379 h0.76
  text "EN" at 64.057,9.83 h0.76
  text "EN" at 39.243,8.382 h0.76 r90
  text "GND" at 8.89,8.3 h0.76 r90
  text "MUX1" at 13.9,8.3 h0.76 r90
  text "CS4" at 16.4,8.3 h0.76 r90
  text "CS3" at 19,8.3 h0.76 r90
  text "CS2" at 21.7,8.3 h0.76 r90
  text "GND" at 26.7,8.3 h0.76 r90
  text "SCK" at 29.24,8.3 h0.76 r90
  text "MISO" at 31.78,8.3 h0.76 r90
  text "MOSI" at 34.32,8.3 h0.76 r90
  text "3V3" at 36.86,8.3 h0.76 r90
  text "GND" at 47,8.3 h0.76 r90
  text "HB" at 49.4,8.3 h0.76 r90
  text "RST" at 63.33,8.28 h0.76
  text "GND" at 66.675,6.858 h0.76
  text "3V3" at 57.658,6.223 h0.76
  text "3V3" at 66.675,5.334 h0.76
  text "5V" at 57.658,3.556 h0.76
  text "5V" at 54.483,1.702 h0.65 r90
  text "SDO" at 8.763,1.441 h0.65 r90
  text "GND" at 16.373,1.441 h0.65 r90
  text "RST" at 18.973,1.441 h0.65 r90
  text "GND" at 21.473,1.441 h0.65 r90
  text "CS0" at 29.073,1.441 h0.65 r90
  text "GND" at 34.173,1.441 h0.65 r90
  text "GND" at 41.808,1.441 h0.65 r90
  text "GND" at 51.816,1.441 h0.65 r90
  text "CS1" at 26.573,1.424 h0.65 r90
  text "MUX0" at 13.716,1.27 h0.56 r90
  text "RX" at 46.873,1.27 h0.65 r90
  text "TX" at 49.373,1.27 h0.65 r90
Bottom Overlay:
  text "GND" at 4.953,31.242 h0.76 r90
  text "3V3" at 10.922,31.242 h0.76 r90
  text "TX" at 6.35,30.48 h0.76 r90
  text "RX" at 8.001,30.48 h0.76 r90
  text "HB" at 9.525,30.48 h0.76 r90
Mechanical 1:
  lines w0.178: 78.994,0.991 0,0.991 0,46.99 33.147,46.99 33.147,55.071 61.976,55.118 78.996,48.138 ; 78.994,1.041 78.994,48.133